# Altium PCB PCB1.pcbdoc
Units mil, origin at the board's own origin, x right, y up, seen from the top; angles counter-clockwise.
Board outline 5130 x 3825 mil, 2 copper layers (Top Layer, Bottom Layer); 23 components, 20 nets, 110 pads, 40 vias.
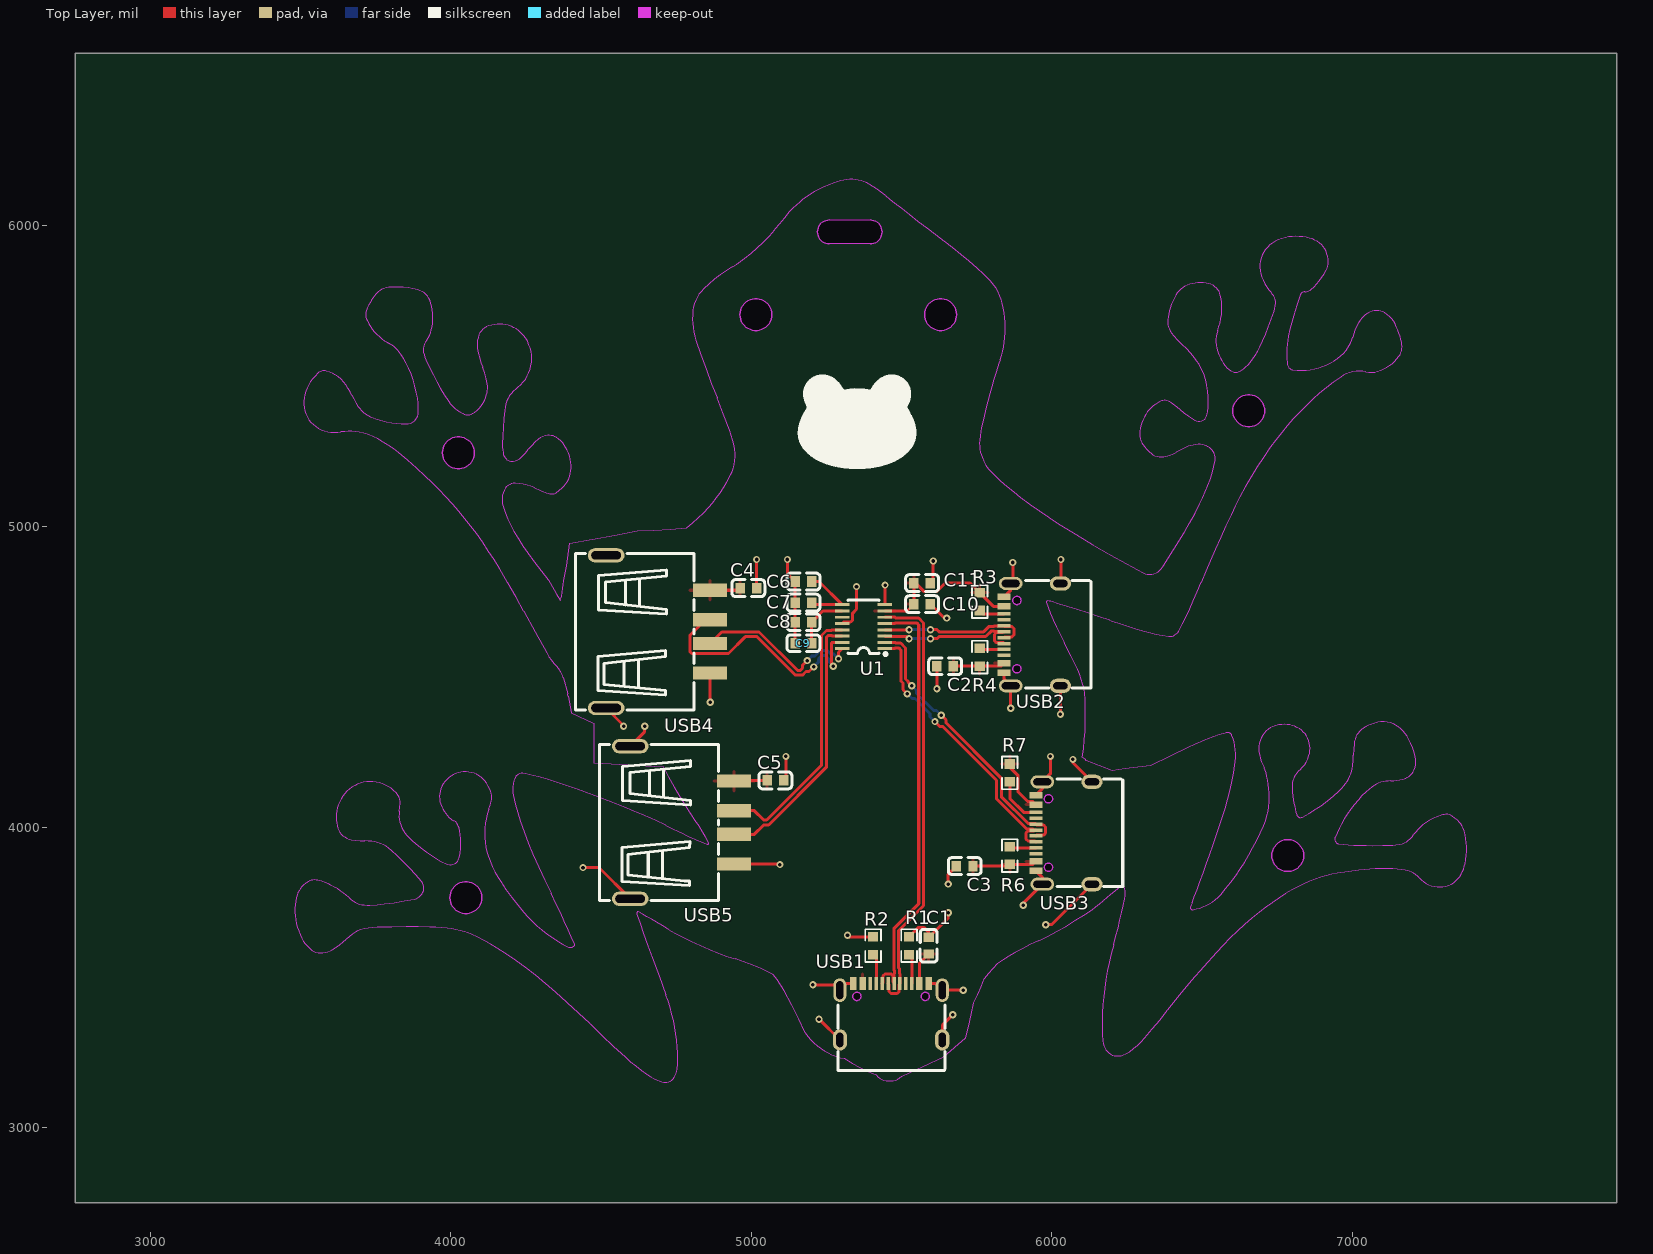
[diagram p0: Top Layer view]
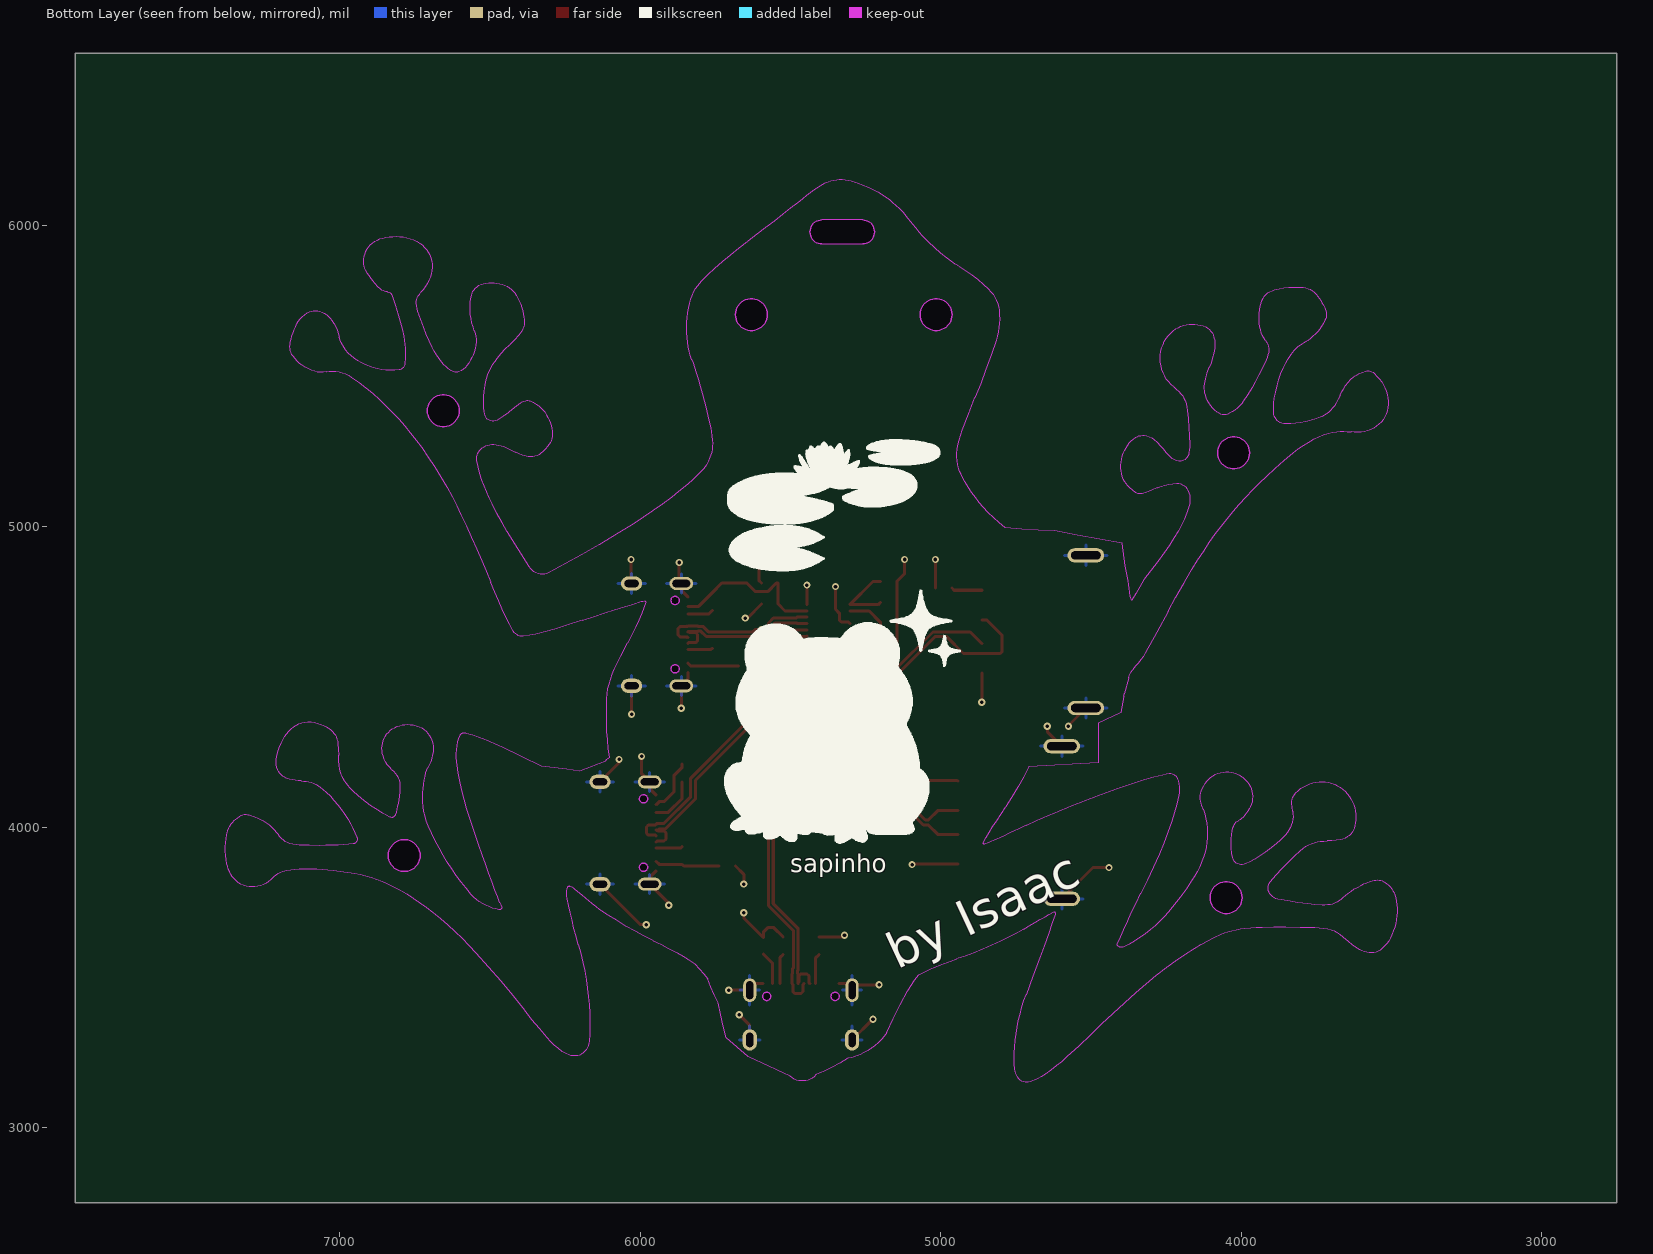
[diagram p1: Bottom Layer view, seen from below]

## Layer stack, top to bottom
Top Layer: signal copper (thickness not stored)
Dielectric: dielectric 12.6, FR-4, Dk 4.8
Bottom Layer: signal copper (thickness not stored)

## Board outline
7880,2750 2750,2750 2750,6575 7880,6575
cut-out: 5068.15,5705 cw(c5015,5705) 4961.85,5705 cw(c5015,5705)
cut-out: 5683.15,5705 cw(c5630,5705) 5576.85,5705 cw(c5630,5705)
cut-out: 4078.15,5245 cw(c4025,5245) 3971.85,5245 cw(c4025,5245)
cut-out: 6708.15,5385 cw(c6655,5385) 6601.85,5385 cw(c6655,5385)
cut-out: 6838.15,3905 cw(c6785,3905) 6731.85,3905 cw(c6785,3905)
cut-out: 4103.15,3765 cw(c4050,3765) 3996.85,3765 cw(c4050,3765)
cut-out: 5260,6020 5395,6020 cw(c5395,5980) 5435,5980 cw(c5395,5980) 5395,5940 5260,5940 cw(c5260,5980) 5220,5980 cw(c5260,5980)

## Design rules (kind name [scope] priority, off if disabled: settings)
BoardOutlineClearance copperThickness1oz [All] p0: genericclearance=10 ignorepadtopadclearanceinfootprint=FALSE except(0: Arc-SplitContinuation Track-SplitContinuation SMDPad-SplitContinuation THPad-SplitContinuation Via-SplitContinuation Fill-SplitContinuation Poly-SplitContinuation Region-SplitContinuation Text-SplitContinuation; 6: Track-CutoutEdge SMDPad-CutoutEdge THPad-CutoutEdge Via-CutoutEdge Region-CutoutEdge; 11.8: Track-OutlineEdge SMDPad-OutlineEdge THPad-OutlineEdge Via-OutlineEdge Fill-OutlineEdge Region-OutlineEdge Poly-OutlineEdge Text-OutlineEdge Fill-CutoutEdge)
BoardOutlineClearance copperThickness2oz [All] p0: genericclearance=10 ignorepadtopadclearanceinfootprint=FALSE except(0: Arc-SplitContinuation Track-SplitContinuation SMDPad-SplitContinuation THPad-SplitContinuation Via-SplitContinuation Fill-SplitContinuation Poly-SplitContinuation Region-SplitContinuation Text-SplitContinuation; 6: Track-CutoutEdge SMDPad-CutoutEdge THPad-CutoutEdge Via-CutoutEdge Region-CutoutEdge; 11.8: Track-OutlineEdge SMDPad-OutlineEdge THPad-OutlineEdge Via-OutlineEdge Fill-OutlineEdge Region-OutlineEdge Poly-OutlineEdge Text-OutlineEdge Fill-CutoutEdge)
Clearance copperThickness1oz [(InNet('GND') OR InNet('+5V') OR InNet('$1N2703') OR InNet('$1N2870') OR InNet('$1N1239') OR InNet('$1N1234') OR InNet('$1N2325') OR InNet('$1N1560') OR InNet('$1N1664') OR InNet('$1N2519') OR InNet('DN2') OR InNet('DP2') OR InNet('DN1') OR InNet('DP1') OR InNet('DN') OR InNet('DP') OR InNet('DN4') OR InNet('DP4') OR InNet('DN3') OR InNet('DP3'))] p1: gap=7 ignorepadtopadclearanceinfootprint=FALSE except(4: Track-Track; 6: Track-SMDPad SMDPad-SMDPad Track-THPad SMDPad-THPad THPad-THPad Track-Via SMDPad-Via THPad-Via Via-Via SMDPad-Fill THPad-Fill Via-Fill Fill-Fill Track-Region SMDPad-Region THPad-Region Via-Region Region-Region Track-Poly SMDPad-Poly THPad-Poly Via-Poly Fill-Poly Region-Poly Poly-Poly Track-Text SMDPad-Text THPad-Text Via-Text Fill-Text Region-Text Poly-Text Text-Text; 6.9: Track-Hole SMDPad-Hole THPad-Hole Via-Hole Fill-Hole Region-Hole Poly-Hole Text-Hole Sheet-Hole; 11.8: Track-Fill Fill-Region Track-Sheet SMDPad-Sheet THPad-Sheet Via-Sheet Fill-Sheet Region-Sheet Poly-Sheet Text-Sheet)
Clearance copperThickness2oz [All] p1: gap=7 ignorepadtopadclearanceinfootprint=FALSE except(6: Track-SMDPad SMDPad-SMDPad Track-THPad SMDPad-THPad THPad-THPad Track-Via SMDPad-Via THPad-Via Via-Via SMDPad-Fill THPad-Fill Via-Fill Fill-Fill Track-Region SMDPad-Region THPad-Region Via-Region Region-Region Track-Poly SMDPad-Poly THPad-Poly Via-Poly Fill-Poly Region-Poly Poly-Poly Track-Text SMDPad-Text THPad-Text Via-Text Fill-Text Region-Text Poly-Text Text-Text; 6.9: Track-Hole SMDPad-Hole THPad-Hole Via-Hole Fill-Hole Region-Hole Poly-Hole Text-Hole Sheet-Hole; 8: Track-Track; 11.8: Track-Fill Fill-Region Track-Sheet SMDPad-Sheet THPad-Sheet Via-Sheet Fill-Sheet Region-Sheet Poly-Sheet Text-Sheet)
DiffPairsRouting differentialPair [All] p1: maxuncoupledlength=10 minlimit=6 maxlimit=6 mostfreqgap=6 toplayer_minwidth=5 toplayer_prefwidth=10 toplayer_maxwidth=100 bottomlayer_minwidth=5 bottomlayer_prefwidth=10 bottomlayer_maxwidth=100
PasteMaskExpansion pasteMaskExpansion [All] p1: expansion=0
PlaneConnect innerPlane [All] p1: planeconnectstyle=Relief reliefexpansion=20 reliefentries=4 reliefconductorwidth=10 reliefairgap=10
PolygonConnect copperRegion [All] p1: connectstyle=Relief reliefentries=4 reliefconductorwidth=10 polygonreliefangle="90 Angle" airgapwidth=10
RoutingVias viaSize [All] p1: viastyle="Through Hole" holewidth=12.0078 minholewidth=11.811 maxholewidth=248.0314 width=24.0158 minwidth=19.685 maxwidth=393.7008
SolderMaskExpansion solderMaskExpansion [All] p1: useseparateexpansions=TRUE expansion=2 expansionbottom=2
Width copperThickness1oz [All] p1: maxlimit=100 minlimit=5 preferedwidth=10
Width copperThickness2oz [All] p1: maxlimit=100 minlimit=8 preferedwidth=10

## Components (designator, comment, footprint, x,y, rotation, side; value= is the part's Value field where it differs from the comment)
C1 "CAP_0603" C0603 5590,3605 r90 top
C2 "CAP_0603" C0603 5645,4535 r180 top
C3 "CAP_0603" C0603 5710,3870 r180 top
C4 "CAP_0603" C0603 4990,4795 r0 top
C5 "CAP_0603" C0603 5080,4155 r0 top
C6 "CAP_0603" C0603 5173.34,4816.66 r180 top
C7 "CAP_0603" C0603 5173.34,4746.66 r180 top
C8 "CAP_0603" C0603 5173.34,4681.66 r180 top
C9 "CAP_0603" C0603 5173.34,4611.66 r180 top
C10 "CAP_0603" C0603 5568.34,4741.66 r0 top
C11 "CAP_0603" C0603 5568.34,4811.66 r0 top
R1 "Res_0603" R0603 5525,3605 r270 top
R2 "Res_0603" R0603 5405,3605 r270 top
R3 "Res_0603" R0603 5760,4750 r270 top
R4 "Res_0603" R0603 5760,4565 r90 top
R6 "Res_0603" R0603 5860,3905 r90 top
R7 "Res_0603" R0603 5860,4180 r270 top
U1 "SL2.1s" SSOP-16_L4.6-W2.6-P0.53-LS4.0-BL 5373.34,4666.66 r90 top
USB1 "TYPE-C 16PIN 2MD(073)" USB-C-SMD_TYPE-C-16PIN-2MD-073#1 5465,3385 r0 top
USB2 "TYPE-C 16PIN 2MD(073)" USB-C-SMD_TYPE-C-16PIN-2MD-073#2 5935,4640 r90 top
USB3 "TYPE-C 16PIN 2MD(073)" USB-C-SMD_TYPE-C-16PIN-2MD-073#2 6040,3980 r90 top
USB4 "10.0 QHHTZB6.3" USB-A-TH_10.0QHHTZB6.3 4690,4650 r270 top
USB5 "10.0 QHHTZB6.3" USB-A-TH_10.0QHHTZB6.3 4770,4015 r270 top

## Footprints (in the part's own frame and the unit in brackets; to place one, negate y for a bottom-side part, rotate by r counter-clockwise, add the part's x,y. Pads: shape width x height; smd on the part's side, far side on the other; paste and mask are expansions set on the pad)
C0603 [mm]
  rect 0.8x0.9 smd: 1(-0.7,0) 2(0.7,0)
  silkscreen extent -1.39,-0.71 1.39,0.71
R0603 [mil]
  rect 31.75x34.02 smd: 1(-29.66,0) 2(29.66,0)
  silkscreen extent -55,-26 55,26
SSOP-16_L4.6-W2.6-P0.53-LS4.0-BL [mm]
  rect 0.25x1.2 smd: 1(-1.855,-1.8) 2(-1.325,-1.8) 3(-0.795,-1.8) 4(-0.265,-1.8) 5(0.265,-1.8) 6(0.795,-1.8) 7(1.325,-1.8) 8(1.855,-1.8) 9(1.855,1.8) 10(1.325,1.8) 11(0.795,1.8) 12(0.265,1.8) 13(-0.265,1.8) 14(-0.795,1.8) 15(-1.325,1.8) 16(-1.855,1.8)
  silkscreen extent -2.45,-1.99 2.25,1.3
USB-A-TH_10.0QHHTZB6.3 [mm]
  rect 1.12x2.88 smd: 1(-3.5,4.395) 2(-1,4.395) 3(1,4.395) 4(3.5,4.395)
  oval 1.2x3.1 hole 0.7 slot 2.5 at 90 deg: 5(-6.45,-4.395) 6(6.45,-4.395)
  silkscreen extent -6.6,-6.99 6.6,3.05
USB-C-SMD_TYPE-C-16PIN-2MD-073#1 [mm]
  oval 1.2x1.8 hole 0.6 slot 1.2 at 90 deg: 13(-4.325,-2.375) 14(4.325,-2.375)
  oval 1.1x2 hole 0.6 slot 1.5 at 90 deg: 13(-4.325,1.825) 14(4.325,1.825)
  rect 0.55x1.1 smd: A1B12(-3.2,2.375) A4B9(-2.4,2.375) B1A12(3.2,2.375) B4A9(2.4,2.375)
  rect 0.3x1.1 smd: A5(-1.25,2.375) A6(-0.25,2.375) A7(0.25,2.375) A8(1.25,2.375) B5(1.75,2.375) B6(0.75,2.375) B7(-0.75,2.375) B8(-1.75,2.375)
  Board Outline Layer circle w0.005: c-2.89,1.305 r0.35
  Board Outline Layer circle w0.005: c2.89,1.305 r0.35
  Board Outline Layer region: -2.54,1.305 -2.575,1.153 -2.672,1.031 -2.812,0.964 -2.968,0.964 -3.108,1.031 -3.205,1.153 -3.24,1.305 -3.24,1.305 -3.205,1.457 -3.108,1.579 -2.968,1.646 -2.812,1.646 -2.672,1.579 -2.575,1.457 -2.54,1.305
  Board Outline Layer region: 3.24,1.305 3.205,1.153 3.108,1.031 2.968,0.964 2.812,0.964 2.672,1.031 2.575,1.153 2.54,1.305 2.54,1.305 2.575,1.457 2.672,1.579 2.812,1.646 2.968,1.646 3.108,1.579 3.205,1.457 3.24,1.305
  Multi-Layer board cut-out: -2.54,1.305 -2.575,1.153 -2.672,1.031 -2.812,0.964 -2.968,0.964 -3.108,1.031 -3.205,1.153 -3.24,1.305 -3.24,1.305 -3.205,1.457 -3.108,1.579 -2.968,1.646 -2.812,1.646 -2.672,1.579 -2.575,1.457 -2.54,1.305
  Multi-Layer board cut-out: 3.24,1.305 3.205,1.153 3.108,1.031 2.968,0.964 2.812,0.964 2.672,1.031 2.575,1.153 2.54,1.305 2.54,1.305 2.575,1.457 2.672,1.579 2.812,1.646 2.968,1.646 3.108,1.579 3.205,1.457 3.24,1.305
  silkscreen extent -4.5,-4.97 4.57,0.6
USB-C-SMD_TYPE-C-16PIN-2MD-073#2 [mm]
  oval 1.2x1.8 hole 0.6 slot 1.2 at 90 deg: 13(-4.325,-2.375) 14(4.325,-2.375)
  oval 1.1x2 hole 0.6 slot 1.5 at 90 deg: 13(-4.325,1.825) 14(4.325,1.825)
  rect 0.55x1.1 smd: A1B12(-3.2,2.375) A4B9(-2.4,2.375) B1A12(3.2,2.375) B4A9(2.4,2.375)
  rect 0.3x1.1 smd: A5(-1.25,2.375) A6(-0.25,2.375) A7(0.25,2.375) A8(1.25,2.375) B5(1.75,2.375) B6(0.75,2.375) B7(-0.75,2.375) B8(-1.75,2.375)
  Board Outline Layer circle w0.005: c-2.89,1.305 r0.35
  Board Outline Layer circle w0.005: c2.89,1.305 r0.35
  Board Outline Layer region: -2.89,0.955 -3.042,0.99 -3.164,1.087 -3.231,1.227 -3.231,1.383 -3.164,1.523 -3.042,1.62 -2.89,1.655 -2.89,1.655 -2.738,1.62 -2.616,1.523 -2.549,1.383 -2.549,1.227 -2.616,1.087 -2.738,0.99 -2.89,0.955
  Board Outline Layer region: 2.89,0.955 2.738,0.99 2.616,1.087 2.549,1.227 2.549,1.383 2.616,1.523 2.738,1.62 2.89,1.655 2.89,1.655 3.042,1.62 3.164,1.523 3.231,1.383 3.231,1.227 3.164,1.087 3.042,0.99 2.89,0.955
  Multi-Layer board cut-out: -2.89,0.955 -3.042,0.99 -3.164,1.087 -3.231,1.227 -3.231,1.383 -3.164,1.523 -3.042,1.62 -2.89,1.655 -2.89,1.655 -2.738,1.62 -2.616,1.523 -2.549,1.383 -2.549,1.227 -2.616,1.087 -2.738,0.99 -2.89,0.955
  Multi-Layer board cut-out: 2.89,0.955 2.738,0.99 2.616,1.087 2.549,1.227 2.549,1.383 2.616,1.523 2.738,1.62 2.89,1.655 2.89,1.655 3.042,1.62 3.164,1.523 3.231,1.383 3.231,1.227 3.164,1.087 3.042,0.99 2.89,0.955
  silkscreen extent -4.5,-4.97 4.57,0.6

## Via types
v1: diameter 24.02, hole 12.01, Top Layer to Bottom Layer, 40 vias

## Nets (pads, with @x,y where several pads share a name; then routed paths per layer and width w, separated by ;. In a path a pad name is that pad's centre, name@x,y a point inside that pad or via, vN(x,y) a via of type N, cw(c..) or ccw(c..) an arc to the next point about the centre after c; other vN are vias at no path point)
$1N1234: R2.2 USB1.A5 | length 101.3
  Top Layer w10: R2.2 5415.8,3564.55 USB1.A5
$1N1239: R1.2 USB1.B5 | length 100.5
  Top Layer w10: R1.2 5533.9,3566.43 USB1.B5
$1N1560: R4.2 USB2.A5 | length 83.1
  Top Layer w10: R4.2 5763.86,4590.8 USB2.A5
$1N1664: R6.2 USB3.A5 | length 88.1
  Top Layer w10: R6.2 5863.86,3930.8 USB3.A5
$1N2325: R3.2 USB2.B5 | length 86.2
  Top Layer w10: R3.2 5771.44,4708.9 USB2.B5
$1N2519: R7.2 USB3.B5 | length 160.9
  Top Layer w10: R7.2 5860,4095 5906.1,4048.91 USB3.B5
$1N2703: C6.1 C7.1 U1.9 | length 237.9
  Top Layer w10: C7.1 5207.87,4739.69 U1.9 5225.5,4816.66 C6.1
$1N2870: C8.1 C9.1 U1.10 | length 187
  Top Layer w10: C9.1 C8.1 5238.07,4718.83 U1.10
+5V: C1.1 C2.1 C3.1 C4.1 C5.1 C10.1 C11.1 R3.1 R4.1 R6.1 R7.1 U1.7 USB1.A4B9 USB1.B4A9 USB2.A4B9 USB2.B4A9 USB3.A4B9 USB3.B4A9 USB4.1 USB5.1 | length 1426.1
  Top Layer w10: USB4.1 4955.23,4787.79 C4.1 ; USB5.1 4945.24,4155 C5.1 ; U1.7 5517.95,4718.83 C10.1 C11.1 5546.9,4811.66 5575.6,4782.96 5616.2,4782.96 5644.9,4811.66 5728,4811.66 R3.1 5805.16,4734.49 USB2.B4A9 ; USB1.B4A9 5559.49,3546.93 C1.1 ; C2.1 5672.9,4535.34 R4.1 5814.81,4535.34 5815.29,4535.83 5831.81,4535.83 USB2.A4B9 ; C3.1 5854.66,3870 R6.1 5919.81,3875.34 5920.29,3875.83 5936.81,3875.83 USB3.A4B9 ; R7.1 5860,4198.76 5887.99,4170.77 5887.99,4116.47 5920.29,4084.17 5936.82,4084.17 USB3.B4A9
DN: U1.5 USB1.A7 USB1.B7 | length 1440.9
  Top Layer w10: USB1.B7 5438.27,3481.3 5438.27,3504.71 5444.7,3511.14 5465.61,3511.14 5472.04,3504.71 5472.04,3484.24 5473.96,3482.33 5473.96,3479.39 USB1.A7 5474.85,3510.16 5476.69,3512 5476.69,3522 5474,3524.68 5474,3661.63 5557.07,3744.7 5557.07,4672.45 5550,4679.52 5480.27,4679.52 5477.83,4677.09 U1.5
DN1: U1.3 USB2.A7 USB2.B7 | length 506
  Top Layer w10: U1.3 5446.03,4633.54 5517.99,4633.54 v1(5525,4626.53) ; v1(5596.06,4626.53) 5618.07,4626.53 5625.07,4633.53 5779.85,4633.53 5798,4651.69 5808,4651.69 5809.84,4649.85 USB2.A7 5840.61,4648.96 5837.67,4648.96 5835.76,4647.04 5815.29,4647.04 5808.86,4640.61 5808.86,4619.7 5815.29,4613.27 5838.7,4613.27 USB2.B7
  Bottom Layer w10: v1(5525,4626.53) v1(5596.06,4626.53)
DN2: U1.1 USB3.A7 USB3.B7 | length 963.1
  Top Layer w10: U1.1 5477.83,4593.63 5480.27,4596.06 5490.27,4596.06 5497.34,4588.99 5497.34,4486.03 5504.49,4478.88 5504.49,4457.11 v1(5518.8,4442.8) ; v1(5610.8,4350.8) 5626.36,4335.24 5636.26,4335.24 5816.01,4155.49 5816.01,4093.98 5917.35,3992.64 5937.08,3992.64 5939.87,3989.84 USB3.A7 5945.61,3988.96 5942.67,3988.96 5940.76,3987.04 5920.29,3987.04 5913.86,3980.61 5913.86,3959.7 5920.29,3953.27 5943.7,3953.27 USB3.B7
  Bottom Layer w10: v1(5518.8,4442.8) 5534.36,4427.24 5544.26,4427.24 5595.24,4376.26 5595.24,4366.36 v1(5610.8,4350.8)
DN3: U1.15 USB4.2 | length 868.5
  Top Layer w10: USB4.2 4847.5,4689.37 4795.35,4637.23 4795.35,4584.03 4801.79,4577.6 4924.27,4577.6 4979.9,4633.23 5018.98,4633.23 5146.89,4505.32 5170.14,4505.32 5181.9,4517.07 5191.8,4517.07 v1(5207.36,4532.64) ; v1(5272.34,4535.15) 5266.41,4541.07 5266.41,4612.06 5268.85,4614.5 U1.15
  Bottom Layer w10: v1(5207.36,4532.64) 5222.93,4548.2 5222.93,4558.1 5236.1,4571.28 5246.1,4571.28 5256.77,4560.61 5256.77,4550.71 v1(5272.34,4535.15)
DN4: U1.13 USB5.2 | length 887.8
  Top Layer w10: USB5.2 5009.72,4054.37 5041.09,4023 5051.09,4023 5233.34,4205.25 5233.34,4637.35 5249.79,4653.79 5266.41,4653.79 5268.85,4656.23 U1.13
DP: U1.6 USB1.A6 USB1.B6 | length 1467.4
  Top Layer w10: U1.6 5477.83,4697.96 5480.27,4695.52 5556.63,4695.52 5573.07,4679.08 5573.07,3738.07 5490,3655 5490,3531.31 5492.69,3528.63 5492.69,3512 5494.52,3510.16 USB1.B6 5491.73,3475.71 5491.73,3452.3 5485.3,3445.87 5464.39,3445.87 5457.96,3452.3 5457.96,3475.7 USB1.A6
DP1: U1.4 USB2.A6 USB2.B6 | length 502.4
  Top Layer w10: U1.4 5524.7,4656.23 v1(5525,4656.53) ; v1(5596.06,4656.53) 5618.07,4656.53 5625.07,4649.53 5773.22,4649.53 5791.37,4667.69 5808,4667.69 5809.84,4669.52 USB2.B6 5844.29,4666.73 5867.7,4666.73 5874.13,4660.3 5874.13,4639.39 5867.7,4632.96 5844.3,4632.96 USB2.A6
  Bottom Layer w10: v1(5525,4656.53) v1(5596.06,4656.53)
DP2: U1.2 USB3.A6 USB3.B6 | length 955.8
  Top Layer w10: U1.2 5477.83,4614.5 5480.27,4612.06 5496.9,4612.06 5513.34,4595.62 5513.34,4492.66 5520.49,4485.51 5520.49,4483.54 v1(5534.08,4469.95) ; v1(5632.01,4372.01) 5647.58,4356.45 5647.58,4346.55 5832.01,4162.12 5832.01,4100.61 5920.29,4012.33 5943.69,4012.33 USB3.B6 5949.29,4006.73 5972.7,4006.73 5979.13,4000.3 5979.13,3979.39 5972.7,3972.96 5949.3,3972.96 USB3.A6
  Bottom Layer w10: v1(5534.08,4469.95) 5549.64,4454.39 5549.64,4444.49 5606.55,4387.58 5616.45,4387.58 v1(5632.01,4372.01)
DP3: U1.16 USB4.3 | length 579.2
  Top Layer w10: USB4.3 4901.63,4649.23 5025.61,4649.23 5153.52,4521.32 5163.52,4521.32 5170.59,4528.39 5170.59,4538.29 v1(5186.15,4553.85) ; v1(5289.95,4559.96) 5289.95,4581.11 U1.16
  Bottom Layer w10: v1(5186.15,4553.85) 5201.71,4569.41 5211.61,4569.41 5229.48,4587.28 5252.73,4587.28 5264.49,4575.52 5274.39,4575.52 v1(5289.95,4559.96)
DP4: U1.14 USB5.3 | length 887.8
  Top Layer w10: USB5.3 5009.72,3975.63 5041.09,4007 5057.72,4007 5249.34,4198.62 5249.34,4630.72 5256.41,4637.79 5266.41,4637.79 5268.85,4635.36 U1.14
GND: C1.2 C2.2 C3.2 C4.2 C5.2 C6.2 C7.2 C8.2 C9.2 C10.2 C11.2 R1.1 R2.1 U1.8 U1.12 USB1.13 USB1.14 USB1.A1B12 USB1.B1A12 USB2.13 USB2.14 USB2.A1B12 USB2.B1A12 USB3.13 USB3.14 USB3.A1B12 USB3.B1A12 USB4.4 USB4.5 USB4.6 USB5.4 USB5.5 USB5.6 | length 3411.7
  Top Layer w10: v1(4440,3865) 4493.03,3865 USB5.6 ; USB4.6 4575,4338.03 v1(4575,4335) ; USB5.5 4645,4316.97 v1(4645,4335) ; v1(4863.03,4415) USB4.4 ; USB5.4 5092.79,3877.21 v1(5095,3875) ; C4.2 v1(5017.56,4890) ; C5.2 5115,4162.44 v1(5115,4235) ; v1(5120,4890) 5120,4842.44 C6.2 C7.2 C8.2 C9.2 ; v1(5205,3475) 5276.58,3475 5294.73,3456.86 5316.38,3478.51 USB1.A1B12 ; v1(5225,3360) 5226.22,3360 USB1.13@5294.73,3291.49 ; U1.12 5307.44,4682.05 5330.64,4682.05 5337.08,4688.49 5337.08,4711.69 5350,4724.62 v1(5350,4800) ; v1(5320,3640) 5325.34,3634.66 R2.1 ; U1.8 5445,4740.48 v1(5445,4805) ; R1.1 5555.34,3665 5575,3665 5590,3650 C1.2 5655,3697.56 v1(5655,3715) ; USB1.B1A12 5613.62,3478.51 5635.27,3456.86 v1(5705,3456.86) ; C10.2 5642.56,4695 v1(5650,4695) ; C11.2 5605,4820.76 v1(5605,4885) ; v1(5617.44,4460) C2.2 ; USB1.14@5635.27,3291.49 5635.27,3340.28 v1(5670,3375) ; v1(5655,3810) 5655,3842.56 C3.2 ; USB2.A1B12 5841.49,4491.38 5863.15,4469.73 v1(5863.15,4395) ; USB2.B1A12 5863.15,4787.64 5863.15,4810.27 5870,4817.13 v1(5870,4880) ; v1(5905,3740) 5905,3746.58 5968.15,3809.72 5968.15,3832.36 USB3.A1B12 ; USB3.B1A12 5968.15,4127.64 5968.15,4150.27 5995,4177.13 v1(5995,4235) ; v1(5980,3675) 5998.78,3675 USB3.13@6133.51,3809.72 ; v1(6028.51,4375) USB2.13@6028.51,4469.73 ; USB2.14@6028.51,4810.27 6030,4811.77 v1(6030,4890) ; v1(6070,4225) 6070,4213.78 USB3.14@6133.51,4150.27
pads on no net: U1.11 USB1.A8 USB1.B8 USB2.A8 USB2.B8 USB3.A8 USB3.B8

## Polygon pours and split planes (outlines as drawn)
+5V on Top Layer (solid, remove dead copper, pour order 0): 3220,6325 7485,6325 7485,3025 3220,3025
+5V on Top Layer (solid, remove dead copper, pour order 2): 3000,6325 7630,6325 7630,3045 3000,3045
GND on Bottom Layer (solid, remove dead copper, pour order 4): 3215,6290 7485,6290 7485,3000 3215,3000

## Keep-outs
Board Outline Layer:
  circle w1: c5015,5705 r53.15
  region: 5068.15,5705 cw(c5015,5705) 4961.85,5705 cw(c5015,5705)
  circle w1: c5630,5705 r53.15
  region: 5683.15,5705 cw(c5630,5705) 5576.85,5705 cw(c5630,5705)
  circle w1: c4025,5245 r53.15
  region: 4078.15,5245 cw(c4025,5245) 3971.85,5245 cw(c4025,5245)
  circle w1: c6655,5385 r53.15
  region: 6708.15,5385 cw(c6655,5385) 6601.85,5385 cw(c6655,5385)
  circle w1: c6785,3905 r53.15
  region: 6838.15,3905 cw(c6785,3905) 6731.85,3905 cw(c6785,3905)
  circle w1: c4050,3765 r53.15
  region: 4103.15,3765 cw(c4050,3765) 3996.85,3765 cw(c4050,3765)
  region: 5260,6020 5395,6020 cw(c5395,5980) 5435,5980 cw(c5395,5980) 5395,5940 5260,5940 cw(c5260,5980) 5220,5980 cw(c5260,5980)
  lines w1: 5220,5980 ccw(c5260,5980) 5260,5940 5395,5940 ccw(c5395,5980) 5435,5980 ccw(c5395,5980) 5395,6020 5260,6020 ccw(c5260,5980) 5220,5980
  lines w3.94: 3777.92,3744.3 ccw(c3623.44,5058.68) 3878.34,3760.03 ccw(c3870.54,3799.77) 3907.45,3783.09 ccw(c3877.64,3796.56) 3902.96,3817.28 ccw(c3192.04,3235.55) 3841.59,3885.09 ccw(c3257.6,3301.1) 3802.79,3921.47 ccw(c3703.1,3808.03) 3774.75,3940.96 ccw(c3729.91,3857.77) 3747.72,3950.59 ccw(c3714.14,3775.65) 3714.14,3953.78 cw(c3714.14,4190.74) 3669.45,3958.03 cw(c3681.83,4022.48) 3640.42,3971.57 cw(c3672.35,4010.83) 3624.1,3995.56 cw(c3737.83,4031.55) 3618.54,4031.55 cw(c3745.51,4031.55) 3635.04,4094.14 cw(c3732.14,4039.12) 3679.87,4137.73 cw(c3731.47,4040.4) 3740.8,4150.16 cw(c3730.36,4027.38) 3801.06,4128.31 cw(c3730.27,4027.25) 3818.77,4113.23 cw(c3788.25,4083.58) 3828.17,4098.3 cw(c3781.52,4081.1) 3831.22,4079.86 cw(c3634.38,4084.76) 3828.74,4053.22 ccw(c3920.14,4038.39) 3830.32,4015.88 ccw(c3924.45,4039.47) 3846.5,3981.68 ccw(c4000.63,4095.95) 3881,3945.94 ccw(c4430.1,4634.47) 3940.56,3902.39 ccw(c4110.28,4156.2) 3984.93,3877.8 ccw(c3998.55,3908.04) 4012.27,3877.84 ccw(c4000.48,3903.8) 4028.41,3898.08 ccw(c3802.04,3944.46) 4033.11,3944.46 ccw(c3679.16,3944.46) 4031.77,3975.2 ccw(c3922.14,3965.64) 4027.45,3997.6 ccw(c3974.7,3981.59) 4020.22,4012.68 ccw(c4002.07,4000.28) 4009.95,4020.8 cw(c4022.09,4052.46) 3999.83,4026.88 cw(c4073.69,4111.72) 3988.47,4038.3 cw(c4088.05,4124.09) 3977.75,4052.61 cw(c4076.88,4116.86) 3969.38,4067.88 cw(c4041.01,4100.51) 3967.11,4127.61 cw(c4046.6,4098.47) 4007.38,4173.5 cw(c4048.27,4095.28) 4068.99,4181.07 cw(c4049.55,4100.6) 4118.8,4145.97 cw(c3986.3,4059.15) 4130.71,4124.27 cw(c4077.89,4100.46) 4135.58,4105.8 cw(c4070.66,4099.79) 4134.35,4085.86 cw(c3909.29,4135.07) 4126.83,4059.23 ccw(c4371.28,3974.02) 4112.47,3979.87 ccw(c4337.49,3974.78) 4124.18,3902.95 ccw(c4459.81,4015.97) 4165.45,3819.06 ccw(c5163.45,4486.67) 4242.2,3716.6 ccw(c4545.41,3970.05) 4286.13,3671.81 ccw(c4630.69,4068.15) 4339.72,3630.95 ccw(c4641.2,4083.95) 4389.86,3601.32 ccw(c4398.06,3617.07) 4410.62,3604.52 ccw(c4406.93,3608.2) 4411.72,3610.25 ccw(c-1326.01,1150.25) 4390.78,3658.54 ccw(c2407.98,2788.57) 4365.36,3714.31 ccw(c616.11,1941.12) 4333.93,3779.29 cw(c6974.49,5084.84) 4273.39,3909.65 cw(c5471.28,4430.82) 4231.56,4018.95 cw(c5088.4,4303.62) 4207.6,4105.11 cw(c4297.65,4125.4) 4209.67,4153.33 cw(c4269.78,4134.25) 4216.6,4168.15 cw(c4233.68,4157.26) 4225.85,4175.94 cw(c4236.88,4149.62) 4239.39,4178.05 cw(c4225.65,4022.56) 4260.63,4174.68 cw(c4039.74,3214.2) 4351.59,4149.12 cw(c3109.16,424.32) 4478.68,4104.29 cw(c3079.51,344.66) 4609.34,4053.04 cw(c3887.61,2303.53) 4715.29,4005.48 ccw(c6264.06,7190.22) 4768.22,3980.28 ccw(c5548.3,5654.26) 4813.6,3959.87 ; 3777.93,3744.3 cw(c3682.57,4555.63) 3731.11,3740.16 cw(c3724.28,3854.93) 3703.13,3741.92 cw(c3714.94,3805.05) 3681.89,3749.98 cw(c3747.84,3859.85) 3660.24,3766.33 ccw(c3543.56,3641.77) 3644,3779.75 ccw(c3443.02,3503.65) 3623.18,3793.77 ccw(c3442.23,3502.37) 3601.31,3806.26 ccw(c3518.84,3648.71) 3581.85,3815 ccw(c3506.96,3617.38) 3557.64,3822.55 ccw(c3546.33,3776.76) 3540.53,3823.57 ccw(c3545.18,3786.04) 3525.6,3818.39 ccw(c3581.98,3725.23) 3508.92,3805.97 ccw(c3556.8,3753.06) 3488.88,3774.96 ccw(c3643.72,3725.03) 3481.1,3729.79 ccw(c3682.95,3723.88) 3486.11,3678.81 ccw(c3685.22,3724.4) 3503.78,3630.58 ccw(c3614.61,3687.89) 3531.99,3594.39 ccw(c3567.1,3634.13) 3565.88,3581.11 ccw(c3567.59,3655.16) 3605.87,3591.75 ccw(c3465.02,3825.1) 3652.37,3627.14 cw(c3766.66,3506.37) 3681.66,3649.27 cw(c3730.2,3567.67) 3711.32,3660.72 cw(c3763.46,3403.73) 3755.74,3665.84 cw(c3885.79,-751.09) 3851.98,3667.63 cw(c3869.17,1421.67) 3930.3,3666.86 cw(c3912.05,2996.47) 3987.68,3662.83 cw(c3944.06,3278.49) 4031.85,3655.21 cw(c3986.47,3460.47) 4067.81,3643.13 cw(c3774.24,2983.88) 4154.69,3597.11 cw(c3501.55,2544.32) 4247.63,3533.43 cw(c3222.42,2174.27) 4349.44,3450.28 cw(c2153.77,964.34) 4463.54,3344.63 ccw(c8128.66,7121.66) 4579.85,3235.15 ccw(c5039.11,3738.12) 4652.83,3177.15 ccw(c4771.18,3349.03) 4702.33,3152.03 ccw(c4713.38,3183.63) 4734.76,3157.87 ccw(c4701.74,3197.66) 4753.26,3193.26 ccw(c4267.2,3234.73) 4753.92,3267.58 ccw(c4159.75,3227.48) 4741.3,3355.73 ccw(c4119.85,3218.68) 4715.55,3442.55 cw(c24171.11,10754.03) 4670.24,3564.27 cw(c8981.32,5153.71) 4640.6,3647.11 cw(c15148.44,7294.24) 4618.8,3710.52 cw(c4624.43,3712.43) 4620.37,3716.77 cw(c4622.32,3714.69) 4623.67,3717.2 cw(c2562.03,-108.66) 4652.34,3701.61 cw(c3974.69,2466.39) 4685.31,3682.94 cw(c3314.54,1336.23) 4723.73,3660.07 ccw(c5066.35,4225.06) 4770.65,3634.16 ccw(c5431.73,4955.22) 4830.02,3606.08 ccw(c5445.42,4985.9) 4891.66,3580.21 ccw(c5195.92,4352.54) 4945.87,3561 cw(c4689.13,2748.3) 5013.38,3536.5 cw(c4793.14,3001.13) 5072.17,3508.35 cw(c4655.41,3172.7) 5110,3455 cw(c2406.23,2015.62) 5180,3315 ccw(c5344.17,3424.17) 5310,3230 ccw(c5702.73,3852.02) 5415,3175 ccw(c5460,3215) 5500,3170 5639.66,3235 5712.64,3297.96 ccw(c3968.47,3767.42) 5740,3415 ccw(c4983.9,3793.45) 5775,3495 cw(c6180.43,3182) 5818.44,3544.37 cw(c6146.97,3091.59) 5876.93,3581.5 cw(c6608.82,2253.66) 5956.34,3622.27 ccw(c5455.87,4672.02) 6016.13,3652.93 ccw(c5287.91,4977.52) 6078.18,3688.98 ccw(c5361.51,4857.53) 6133.63,3724.85 ; 4390.69,4435.87 ccw(c4313.02,4422.93) 4388.88,4444.03 4374.27,4496.55 ccw(c4298.41,4475.45) 4361.29,4522.84 4352.29,4534.78 cw(c4497.59,4678.95) 4318.96,4579.01 cw(c11719.49,8719.5) 4243.36,4717.14 ccw(c1445.72,3219.42) 4162.13,4859.86 ccw(c2789.95,4031.2) 4085.62,4975.02 ccw(c3012.28,4193.17) 4005.87,5074.16 ccw(c2911.1,4103.44) 3915.12,5167.75 ccw(c2851.32,4040.07) 3826.7,5245.04 ccw(c3559.29,4914.69) 3756.32,5291.28 ccw(c3647.69,5083.66) 3694.64,5313.23 ccw(c3661.05,5148.98) 3634.58,5314.53 cw(c3615.53,5433.67) 3568.3,5322.64 cw(c3605.08,5409.11) 3522.29,5364.67 cw(c3609.99,5411.74) 3511.72,5427.58 cw(c3644.46,5406.19) 3539.97,5490.8 cw(c3706.89,5355.63) 3557.43,5509.89 cw(c3578.08,5488.58) 3570.72,5517.33 cw(c3577.63,5490.35) 3585.63,5517.02 cw(c3533.75,5344.02) 3608.64,5508.38 cw(c3579.09,5443.53) 3625.48,5497.63 cw(c3513.7,5367.26) 3643.23,5480 cw(c3501.94,5357.03) 3659.15,5458.86 cw(c3544.34,5384.49) 3670.56,5437.23 ccw(c3864.36,5518.21) 3690.99,5399.63 ccw(c3770.65,5454.11) 3715.69,5374.78 ccw(c3785.88,5476.1) 3750.34,5358.08 ccw(c3881.55,5793.76) 3802.8,5345.62 ccw(c3850.68,5618.08) 3852.52,5341.45 ccw(c3852.25,5382.21) 3879.99,5352.35 ccw(c3854.18,5380.13) 3892.06,5378.5 ccw(c3655.59,5388.65) 3889.31,5426.02 ccw(c3445.92,5355.12) 3874.64,5488.61 ccw(c3551.97,5388.14) 3851.86,5543.94 ccw(c3627.96,5427.62) 3823.95,5586.53 ccw(c3759.28,5534.09) 3793.8,5609.85 cw(c3831.43,5692.44) 3778.42,5618.78 cw(c3896.52,5782.9) 3761.44,5632.44 cw(c3902.4,5789.45) 3745.56,5648.31 cw(c3842.44,5735.49) 3733.42,5664.06 cw(c3894.51,5769.61) 3721.32,5685.37 cw(c3762.7,5705.49) 3716.85,5701.64 cw(c3757.1,5705.02) 3718.72,5717.62 cw(c3842.31,5677.06) 3727.23,5737.69 cw(c3900.81,5646.24) 3735.65,5752.14 cw(c3915.18,5637.02) 3745.43,5766.13 cw(c3893.11,5653.81) 3755.1,5777.82 cw(c3785.74,5750.29) 3762.87,5784.55 cw(c3798.68,5730.91) 3793.41,5795.19 cw(c3817.94,5496.03) 3841.99,5795.23 cw(c3817.94,5496.02) 3889.67,5787.5 cw(c3875.8,5731.11) 3916.86,5772.17 cw(c3869.93,5725.25) 3933.94,5742.75 cw(c3763.67,5696.19) 3940.17,5699.21 cw(c3753.75,5696.02) 3935.4,5653.98 cw(c3842.53,5675.47) 3919.47,5619.21 ccw(c3970.94,5581.58) 3909.83,5599.77 ccw(c3949.33,5588.01) 3908.82,5580.44 ccw(c4020.23,5601.26) 3917.18,5554.09 ccw(c5204.66,6143.49) 3940.83,5504.95 ccw(c4676.68,5876.74) 3992.84,5416.23 ccw(c4090.97,5482.32) 4038.96,5376.05 ccw(c4056.16,5411.19) 4078.93,5379.38 ccw(c4018.56,5463.72) 4112.95,5420.71 ccw(c4003.74,5470.47) 4120.83,5444.16 ccw(c4045.64,5461.06) 4122.53,5466.2 ccw(c4001.55,5458.11) 4117.94,5492.11 ccw(c3588.71,5337.49) 4105.7,5529.1 cw(c4435.37,5651.28) 4088.72,5592.58 cw(c4170.95,5606.51) 4093.41,5637.22 cw(c4139.11,5619.12) 4118.63,5663.81 cw(c4162.89,5567.23) 4162.89,5673.46 cw(c4162.89,5573.24) 4225.57,5651.45 cw(c4153.44,5561.45) 4264.06,5594.09 cw(c4144.07,5558.68) 4263.88,5522.69 cw(c4151.16,5556.55) 4224.54,5464.53 ccw(c4335.34,5325.58) 4200.55,5441.4 ccw(c4258.28,5391.79) 4186.93,5418.33 ccw(c4314.99,5370.7) 4179.26,5386.33 ccw(c5299.5,5257.36) 4174.14,5329.01 ccw(c5726.21,5230.19) 4171.62,5274 ccw(c4310.78,5270.08) 4173.8,5245.21 ccw(c4213.52,5252.42) 4180.96,5228.56 ccw(c4204.81,5246.04) 4194.22,5218.43 ccw(c4204.41,5244.98) 4208.5,5216.84 ccw(c4202.66,5256.99) 4223.38,5222.1 ccw(c4183.31,5289.58) 4239.69,5235 ccw(c4043.59,5424.83) 4258.52,5256.62 cw(c4419.33,5130.77) 4291.16,5289.73 cw(c4329.55,5242.11) 4322.3,5302.85 cw(c4327.52,5259.1) 4351.31,5296.18 cw(c4300.25,5216.58) 4377.71,5270.84 cw(c4272.15,5196.9) 4395.55,5234.09 cw(c4282.68,5200.07) 4400.43,5194.47 cw(c4295.26,5199.47) 4391.84,5157.54 cw(c4314,5191.34) 4370.94,5128.42 cw(c4257.28,5254.01) 4350.89,5112.84 cw(c4335.98,5135.32) 4336.04,5108.34 cw(c4335.93,5157.45) 4317.75,5111.83 cw(c4667.43,5989.22) 4279.17,5128.21 ccw(c4208.12,4970.65) 4214.38,5143.38 ccw(c4212.96,5104.17) 4177.61,5121.17 ccw(c4244.39,5089.06) 4173.9,5066.21 ccw(c4587.8,5200.4) 4210.06,4984.46 ccw(c4908.77,5383.89) 4255.81,4913.37 ccw(c6398.63,6457.46) 4324.76,4821.93 ccw(c4997.88,5181.05) 4365,4755 ccw(c4151.92,4821.05) 4375,4820 ccw(c3646.16,5000.71) 4395,4945 ccw(c3364.96,11391.8) 4619.99,4985 ccw(c4479.11,8406.32) 4785.15,4995.8 ccw(c4344.87,5538.16) 4858.51,5064.7 ccw(c4566.82,5333.57) 4883.93,5095.21 ccw(c4460.52,5413.47) 4908.19,5130.34 ccw(c4501.52,5387.54) 4927.98,5164.68 ccw(c4791.1,5236.21) 4939.12,5192.14 ccw(c4767.26,5243.31) 4946.21,5231.92 ccw(c4815.62,5240.23) 4943.25,5269.09 ccw(c4570.46,5184.79) 4927.7,5320.65 ccw(c-947.06,3086.53) 4885.83,5427.8 cw(c7922.72,6646.78) 4815.58,5619.98 cw(c5034.17,5692.21) 4805.5,5718.8 cw(c4922.83,5705.16) 4840.9,5790.25 cw(c5221.24,5395.21) 4936.54,5863.89 ccw(c4686.71,6275.14) 4978.45,5892.48 ccw(c4588.04,6404.57) 5020.41,5927.38 ccw(c4585.91,6406.93) 5059.38,5965.81 ccw(c4696.84,6303.57) 5092.29,6005.01 cw(c5588.71,5630.21) 5126.65,6046.64 cw(c5392.92,5806.66) 5160.33,6079.4 cw(c5362.38,5842.47) 5195.85,6105.58 cw(c5382.09,5811.34) 5235.7,6127.31 cw(c5412.58,5745.52) 5298.21,6150.45 cw(c5331.53,6032.47) 5346.44,6154.15 cw(c5331.83,6034.94) 5391.96,6138.91 cw(c5193.83,5796.31) 5445.71,6101.58 ccw(c6427.59,7291.61) 5475.36,6077.72 ccw(c12211.76,14665.22) 5525.5,6038.63 ccw(c12993.45,15673.77) 5583.39,5994.04 ccw(c13145.89,15872.89) 5641.85,5949.55 cw(c4634.67,4617.65) 5698.59,5904.68 cw(c4774.97,4787.37) 5751.32,5858.91 cw(c4876.54,4898.85) 5794.32,5817.89 cw(c5697.28,5720.72) 5814.53,5792.21 cw(c5670.17,5704.19) 5834.71,5743.12 cw(c5472.63,5657.46) 5844.09,5678.84 cw(c5457.11,5656.57) 5842.18,5612.16 cw(c5614.14,5638.46) 5828.16,5555.47 ccw(c6162.48,5425.83) 5819.78,5531.34 ccw(c8418.32,4731.35) 5807.31,5489.65 ccw(c8718.53,4644.15) 5793.69,5441.26 ccw(c8858.65,4605.97) 5780.71,5392.1 ccw(c7532.35,4944.72) 5765.66,5328.34 ccw(c6070.32,5262.19) 5759.57,5287.36 ccw(c5905.28,5275.55) 5760.3,5256.85 ccw(c5866.29,5270.53) 5767.55,5229.63 ccw(c5924.33,5294.56) 5807.69,5171.31 ccw(c6524.81,5929.11) 5895.02,5097.32 ccw(c6950.67,6491.55) 6021.8,5009.84 ccw(c8700.28,9282.49) 6194.76,4906.16 ccw(c7909.33,7900.96) 6304.09,4846.17 ccw(c6325.83,4887.54) 6339.64,4842.89 ccw(c6323.78,4894.16) 6369.01,4865.26 ccw(c2182.09,7541.03) 6441.67,4982.52 ccw(c5264.62,5689.51) 6492.57,5075.16 ccw(c5904.78,5369.24) 6526.51,5156.08 ccw(c6118.26,5296.05) 6543.09,5220.05 ccw(c6503.29,5227.16) 6534.4,5252.98 ccw(c6492.82,5218.48) 6513.44,5268.42 ccw(c6489.73,5210.97) 6486.82,5273.06 ccw(c6491.71,5168.54) 6453.98,5266.13 ccw(c6558.75,4995.12) 6414.57,5247.38 cw(c6342.4,5373.65) 6379.71,5233.08 cw(c6365.06,5288.29) 6350.24,5233.13 cw(c6365.75,5290.86) 6324.15,5247.93 cw(c6438.68,5366.11) 6299.49,5278.31 cw(c6342.78,5305.61) 6291.63,5307.36 cw(c6414.25,5303.17) 6298.78,5344.65 cw(c6433.96,5296.1) 6318.11,5381.01 cw(c6405.79,5316.75) 6345.87,5407.45 cw(c6408.01,5313.37) 6365.73,5417.89 cw(c6375.27,5394.31) 6380.75,5419.15 cw(c6371.27,5376.22) 6397.22,5411.71 cw(c6093.27,4995.95) 6424.86,5390.02 ccw(c6702.13,5719.53) 6470.3,5356.61 ccw(c6490.3,5387.92) 6498.42,5351.67 ccw(c6493.51,5373.6) 6515.34,5368.29 ccw(c6337.84,5411.44) 6520.51,5411.44 ccw(c6161.23,5411.44) 6515.81,5469.39 ccw(c6324.87,5438.19) 6501.57,5516.98 ccw(c6316.55,5434.48) 6475.34,5560.27 ccw(c6144.42,5298.1) 6434.09,5605.24 cw(c6841.57,6037.29) 6403.81,5635.95 cw(c6462.93,5690.15) 6389.83,5657.15 cw(c6436.11,5678.05) 6385.33,5678.32 cw(c6534.75,5677.52) 6388.23,5706.82 cw(c6549.96,5674.48) 6393.83,5727.66 cw(c6620.3,5650.52) 6402.57,5749.67 cw(c6604.65,5657.65) 6412.89,5769.6 cw(c6486.28,5726.75) 6423.27,5783.78 cw(c6476.52,5735.58) 6449.88,5802.28 cw(c6495.44,5688.23) 6486.17,5810.69 cw(c6494.94,5694.95) 6522.25,5807.77 cw(c6509.33,5754.41) 6548.15,5793.23 cw(c6513.47,5758.55) 6561.11,5770.2 cw(c6397.82,5730.26) 6565.88,5733.94 cw(c6351.11,5729.23) 6562.66,5691.85 cw(c6338.52,5731.46) 6551.27,5650.57 ccw(c6629.03,5621.01) 6546.13,5614.09 ccw(c6700.63,5626.98) 6555.72,5571.86 ccw(c6692.57,5623.92) 6576.11,5535.18 ccw(c6624.6,5572.13) 6602.76,5515.21 ccw(c6613.06,5542.07) 6629.26,5518.3 ccw(c6550.71,5633.57) 6659.8,5546.64 ccw(c6439.94,5721.84) 6691.27,5595.88 ccw(c6083.48,5900.5) 6720.48,5662.95 ccw(c5069.75,6278.53) 6739.46,5716.44 ccw(c6637.59,5750.73) 6744.76,5742.46 ccw(c6707.65,5745.32) 6741.53,5760.72 ccw(c6676.45,5731.15) 6729.45,5779.11 cw(c6841.74,5880.73) 6695.51,5841.33 cw(c6785.92,5865.69) 6700.19,5903.33 cw(c6785.28,5865.97) 6742.61,5948.53 cw(c6811.15,5815.94) 6811.15,5965.2 cw(c6811.15,5773.72) 6857.02,5959.62 cw(c6835.22,5871.29) 6891.28,5942.95 cw(c6848.18,5887.85) 6912.26,5915.92 cw(c6830.83,5880.25) 6919.72,5880.25 cw(c6859.86,5880.25) 6912.79,5852.28 cw(c6712.98,5957.88) 6890.51,5818.03 cw(c6714.96,5956.31) 6863.41,5789.27 cw(c6841.5,5813.93) 6841.5,5780.94 ccw(c6841.5,5764.9) 6826.38,5770.25 ccw(c8110.02,5316.29) 6804.59,5703.16 ccw(c7606.31,5465.56) 6787,5632.73 ccw(c7052.28,5578.6) 6781.54,5578.6 ccw(c7296.77,5578.6) 6782.8,5542.56 ccw(c6807.42,5544.28) 6788.65,5528.25 ccw(c6803.45,5540.9) 6801.38,5521.54 ccw(c6831.68,5803.82) 6831.68,5519.92 ccw(c6831.68,5723.6) 6888.47,5528 ccw(c6833.64,5716.84) 6940.19,5551.57 ccw(c6848.5,5693.79) 6979.62,5586.83 ccw(c6895.87,5655.15) 7000.72,5628.91 cw(c7178.66,5584.38) 7026.19,5686.36 cw(c7088.58,5644.63) 7065.65,5716.11 cw(c7081.17,5667.74) 7107.67,5711.07 cw(c7058.86,5631.25) 7141.97,5674.23 cw(c6940.97,5570.29) 7150.94,5654.66 cw(c6894.01,5551.42) 7158.51,5633.32 cw(c6923.14,5560.44) 7163.79,5613.36 cw(c7096.54,5598.57) 7165.39,5598.57 cw(c7110.13,5598.57) 7154.76,5565.98 cw(c7048.03,5643.91) 7123.87,5535.69 cw(c7041.82,5652.77) 7083.38,5515.97 cw(c7060.37,5591.72) 7044.84,5514.09 ccw(c7023.18,5405.79) 6960.86,5496.97 ccw(c7423.38,4820.27) 6846.05,5402.11 ccw(c7622.03,4620.06) 6727.34,5262.93 ccw(c7849.07,4456.92) 6625.65,5098.15 ccw(c8122.58,4313.57) 6596.5,5039.82 ccw(c10570.03,3148.84) 6561.5,4964.45 ccw(c10766.23,3059.97) 6526.58,4885.4 ccw(c9116.23,3770.39) 6497.33,4814.85 cw(c4711.82,5526.93) 6471.01,4752.11 cw(c5322.85,5257.81) 6445.02,4696.78 cw(c5174.52,5331.97) 6421.59,4651.93 cw(c6390.46,4668.9) 6409.37,4638.91 cw(c6393.38,4664.26) 6389.5,4634.54 cw(c6449.62,5095.19) 6346.65,4642.19 cw(c6536.62,5477.95) 6284.7,4658.73 cw(c7492.06,8585.02) 6193.16,4688.06 ccw(c3445.23,-3556.24) 6118.27,4712.64 ; 4390.69,4435.88 4400,4380 4475,4345 4475,4214.03 4706.15,4200.89 ccw(c5824.92,4760.33) 4783.82,4066.99 cw(c2325.57,2429.87) 4813.61,4021.35 cw(c3529.58,3200.02) 4837.89,3982.1 cw(c1201.34,1808.23) 4857.98,3948.12 ; 4813.59,3959.88 ccw(c7037.55,9088.79) 4852.97,3942.98 ccw(c4854.56,3946.72) 4857.43,3943.85 ccw(c4854.94,3946.34) 4857.98,3948.13 ; 5996.37,4750.54 cw(c3006.37,-5146.96) 6052.66,4733.36 cw(c4561.07,-104.46) 6118.28,4712.64 ; 5996.38,4750.54 ccw(c5985.11,4713.25) 5985.11,4752.2 ccw(c5985.11,4748.41) 5981.54,4747.12 ccw(c6914.6,5083.98) 5995.26,4711.29 ccw(c6764.93,5023.3) 6015.04,4666.36 ccw(c7636.96,5438.39) 6041.57,4612.94 cw(c3356.36,3223.62) 6085.48,4524.57 ; 6085.47,4524.57 cw(c5833.7,4404.55) 6103.43,4475.55 cw(c5889.78,4419.31) 6110.56,4427.44 cw(c4680.51,4374.77) 6111.28,4348.08 cw(c5209.44,4364.9) 6108.31,4289.89 cw(c5234.85,4362.78) 6101.6,4232.44 cw(c6080.22,4195.97) 6115,4220 6201,4187.81 cw(c6514.45,2128.72) 6329.14,4203.27 cw(c8825.72,-696.1) 6458.23,4266.94 cw(c6814.93,3519.18) 6539.28,4300.46 cw(c6840.92,3445.53) 6576.14,4312.58 cw(c6583.84,4287.38) 6590.46,4312.88 cw(c6587.2,4300.33) 6599.18,4305.3 cw(c6451.2,4243.99) 6606.56,4282.98 cw(c6444.24,4242.24) 6611.13,4229.68 cw(c6017.87,4274.33) 6600.94,4156.12 cw(c5605.23,4357.98) 6576.98,4061.53 cw(c3796.73,4909.71) 6537.12,3940.44 cw(c-7245.52,8815.33) 6514.1,3875.83 cw(c-3197.51,7362.15) 6492.68,3816.74 cw(c-4375.67,7793.21) 6474.47,3767.31 cw(c6131.41,3894.6) 6466.92,3748.56 ccw(c6598.21,3691.41) 6461.16,3732.89 ccw(c6466.46,3731.28) 6463.16,3726.83 ccw(c6468.63,3734.21) 6470.58,3725.23 ccw(c6399.05,4053.72) 6491.32,3730.44 ccw(c6451.23,3870.91) 6561.5,3775.11 ccw(c5905.73,4344.82) 6641.37,3882.82 ccw(c5905.2,4345.16) 6705.08,4004.72 ccw(c6487.7,4097.24) 6723.92,4100.81 ccw(c6417.12,4096.17) 6722.31,4127.87 ccw(c6369.62,4091.24) 6718.3,4155.69 ccw(c6411.48,4098.98) 6712.7,4180.37 ccw(c6637.46,4160.04) 6706.18,4196.81 cw(c6841.59,4269.28) 6689.22,4250.01 cw(c6774.7,4260.82) 6696.65,4297.33 cw(c6760.84,4267.3) 6727,4329.56 cw(c6773.86,4243.36) 6773.86,4341.48 cw(c6773.86,4249.36) 6824.07,4326.59 cw(c6782.28,4262.32) 6854.73,4287.37 cw(c6777.62,4260.71) 6855.48,4236.31 cw(c6756.44,4267.35) 6826.08,4190.4 ccw(c6900.41,4108.26) 6810.47,4172.93 ccw(c6855.78,4140.35) 6801.98,4155.2 ccw(c6874.4,4135.21) 6799.3,4133.35 ccw(c7086.21,4140.45) 6801.76,4102.3 ccw(c7334.84,4173.8) 6805.38,4079.13 ccw(c7166.42,4143.69) 6809.74,4058.28 ccw(c7173.78,4145.45) 6814.23,4041.29 ccw(c6827.84,4045.23) 6817.82,4035.21 ccw(c6826.93,4044.32) 6833.14,4033.03 ccw(c6451.02,4727.37) 6879.17,4060.43 ccw(c6561.59,4555.13) 6927.13,4094.73 ccw(c6704.71,4374.87) 6965.41,4129.95 ccw(c6847.82,4240.42) 6983.25,4152.74 ccw(c6890.77,4212.62) 6994.8,4176.34 ccw(c6869.5,4220.03) 7001.23,4203.98 ccw(c6687.79,4242.19) 7003.53,4239.28 cw(c7438.24,4235.28) 7005.53,4277.03 cw(c7082.26,4269.62) 7011.53,4300.29 cw(c7058.68,4279.85) 7023.44,4317.25 cw(c7109.3,4226.12) 7044.19,4333.07 cw(c7104.97,4233.22) 7084.84,4348.36 cw(c7100.54,4258.56) 7125.49,4346.25 cw(c7100.36,4257.92) 7161.29,4326.63 cw(c7082.01,4237.23) 7188.15,4292.11 cw(c6966.09,4177.29) 7209.56,4234.01 cw(c7141.99,4218.27) 7205.47,4190.27 cw(c7158.01,4211.2) 7177.19,4163.02 cw(c7126.95,4289.26) 7126.95,4153.39 ccw(c7126.95,4050) 7102.38,4150.42 ccw(c7126.44,4052.07) 7079.36,4141.71 ccw(c7140.65,4025.01) 7056.41,4126.4 ccw(c7237.74,3908.18) 7031.94,4103.48 ccw(c7364.72,3787.68) 6994.68,4058.88 ccw(c7363.54,3788.54) 6963.4,4009.96 ccw(c7344.12,3799.29) 6942.31,3966.27 ccw(c6957.74,3959.86) 6945.93,3948.05 ccw(c6955.35,3957.47) 6953.92,3944.22 ccw(c7072.79,5044.1) 6985.7,3941.25 ccw(c7050.32,4759.6) 7024.09,3939.12 ccw(c7067.8,5306.23) 7067.79,3938.43 ccw(c7067.8,5895.6) 7133.76,3939.54 ccw(c7128.99,4080.88) 7165.87,3944.35 ccw(c7152.02,3995.64) 7186.39,3955.13 ccw(c7125.66,4026.7) 7204.17,3975.26 cw(c7286.97,3921.01) 7216.72,3990.74 cw(c7365.08,3843.48) 7234.64,4006.83 cw(c7369.46,3837.99) 7254.75,4021.09 cw(c7323.75,3910.95) 7274.01,4031.02 cw(c7374.76,3787.8) 7299.98,4040.22 cw(c7312.2,3998.96) 7316.99,4041.73 cw(c7313.14,4007.29) 7331.91,4036.42 cw(c7256,3918.61) 7350.04,4022.52 cw(c7299.7,3966.9) 7371.73,3987.84 cw(c7161.81,3926.82) 7380.3,3934.27 cw(c7146.67,3926.3) 7375.37,3877.92 cw(c7259.17,3902.5) 7356.45,3834.36 cw(c7294.6,3877.69) 7328.63,3810.27 cw(c7289.33,3888.12) 7291.55,3800.94 cw(c7289.25,3891.36) 7253.42,3808.31 cw(c7286.9,3885.91) 7222.7,3830.94 ccw(c7171.29,3786.93) 7189.68,3852.06 ccw(c7121.59,3610.94) 7134.94,3861.13 ccw(c7107.85,3353.33) 7057.33,3859.34 ccw(c7238.96,2040.18) 6950.43,3845.47 ccw(c7016.69,3430.93) 6823.1,3803.43 ccw(c7191.83,3093.93) 6690.69,3717 ccw(c7497.83,2713.48) 6547.06,3582.13 ccw(c9022.96,1320.1) 6384.63,3390.39 cw(c4377.66,4965.26) 6308.96,3298.46 cw(c6085.65,3491.19) 6259.55,3252.92 cw(c6213.44,3316.09) 6222.2,3238.37 cw(c6217.34,3281.45) 6189.66,3248.09 cw(c6226.09,3291.99) 6169.21,3287.67 cw(c6935.26,3345.86) 6167.75,3379.73 cw(c7080.88,3339.44) 6179.62,3491.63 cw(c7330.07,3297.36) 6205.56,3608.42 ccw(c3893.75,4247.89) 6220.2,3663.91 ccw(c4397.11,4121.54) 6232.59,3716.47 ccw(c4458.2,4108.06) 6241.82,3760.93 ccw(c6128.64,3782.96) 6243.94,3782.35 ccw(c6190.94,3782.63) 6241.14,3799.64 ccw(c6235.44,3797.71) 6233.26,3803.32 ccw(c6253.84,3750.38) 6217.07,3793.66 ccw(c8432.57,1185.27) 6171.36,3754.14 cw(c5915.55,4044.76) 6133.62,3724.85

## Silkscreen, mask and mechanical layers (free items; w line width, h text height)
Top Silkscreen Layer:
  drawing of 7 lines, arcs and shapes, not listed
Bottom Silkscreen Layer:
  drawing of 11 lines, arcs and shapes, not listed
  text "sapinho" at 5500,3850 h59.06
  text "by Isaac" at 5145,3525 h120 r335
Mechanical Layer:
  circle w1: c5015,5705 r53.15
  circle w1: c5630,5705 r53.15
  circle w1: c4025,5245 r53.15
  circle w1: c6655,5385 r53.15
  circle w1: c6785,3905 r53.15
  circle w1: c4050,3765 r53.15
  lines w1: 5220,5980 ccw(c5260,5980) 5260,5940 5395,5940 ccw(c5395,5980) 5435,5980 ccw(c5395,5980) 5395,6020 5260,6020 ccw(c5260,5980) 5220,5980